# EAGLE board ArtNet SMD (EAGLE 5.11)
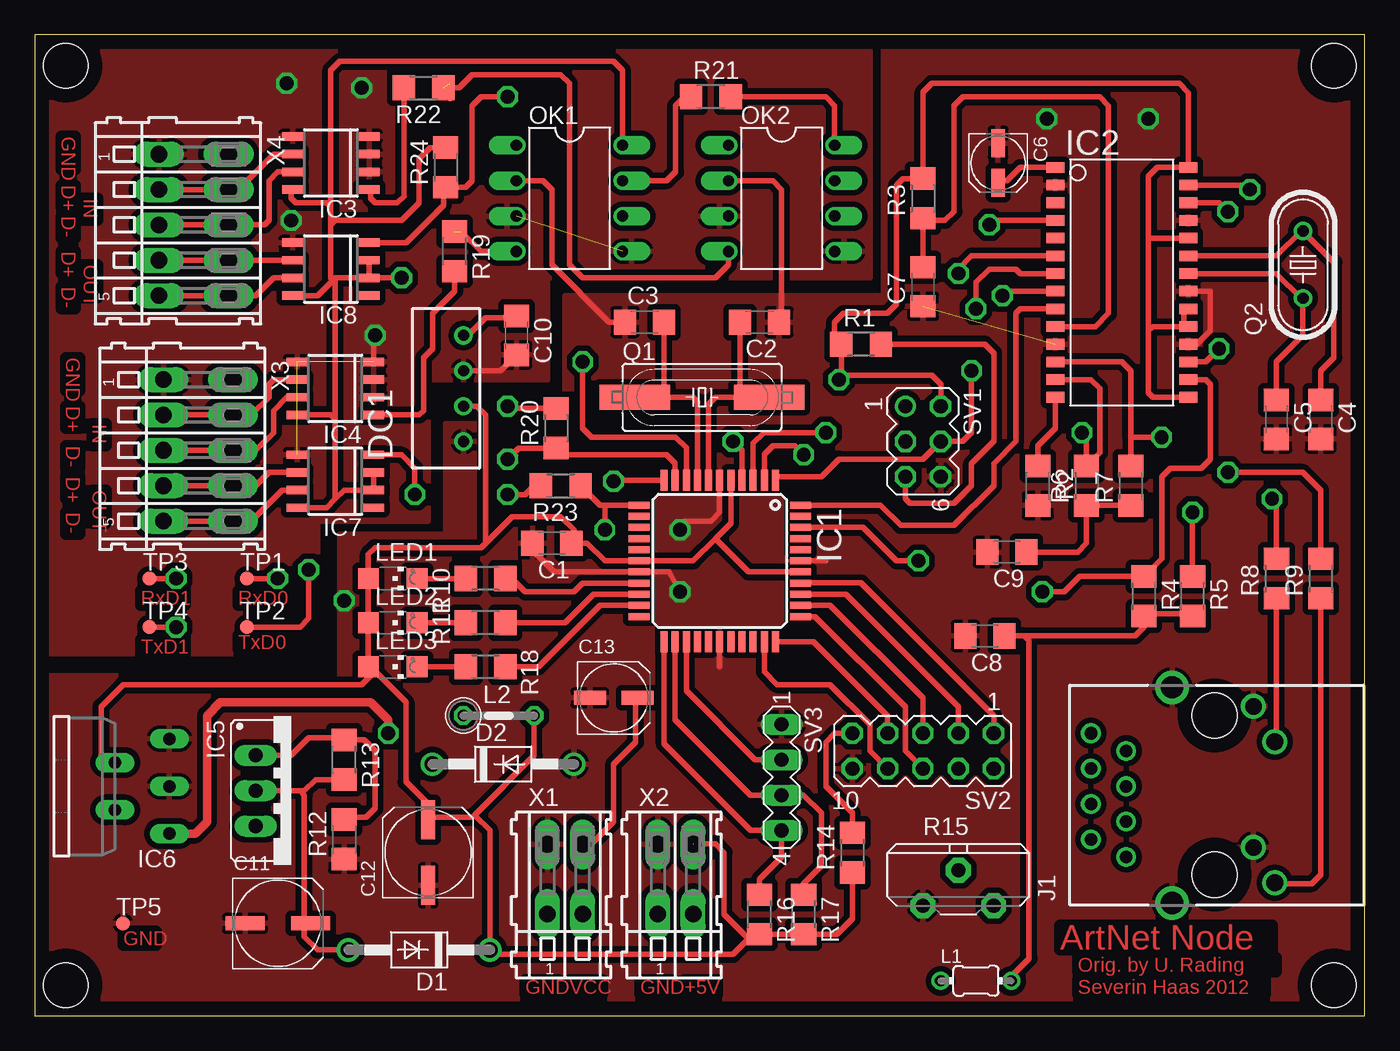
[diagram p0: board, top side]
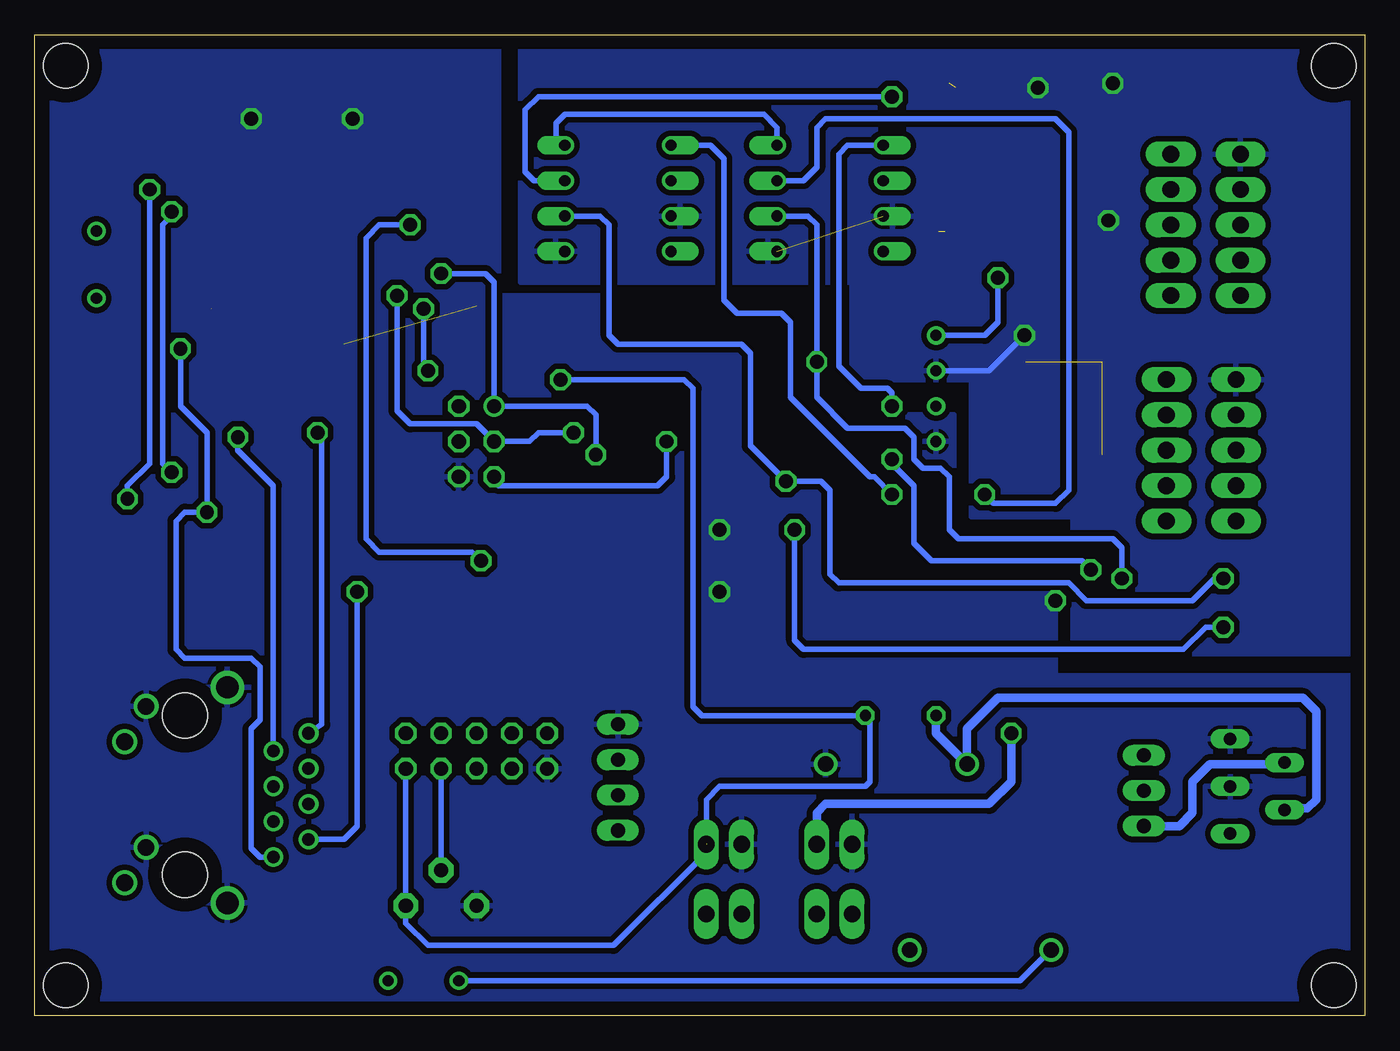
[diagram p1: board, bottom side, seen from below]

Size 95.56 x 70.47 mm. Coordinates in mm from the lower left corner, seen from the top.
Outline: 0,70.47 0,0 95.56,0 95.56,70.47 0,70.47
Copper layers (1*16): Top 0.035mm / dielectric 1.5mm / Bottom 0.035mm
Design rules "default": minimum track width 10mil, minimum drill 24mil, track to track 8mil, track to pad 8mil, pad to pad 8mil, via to via 8mil, smd to smd 8mil, copper to edge 40mil, drill to drill 8mil, minimum pad ring 10mil, minimum via ring 8mil, stop-mask expansion 4mil, vias tented up to drill 0mil, thermal gap 10mil
Holes 3.2 mm at 2.22,2.2 93.34,2.2 93.34,68.24 2.22,68.24

## Footprints (pad centres in the part's own frame; a part is rotated, then mirrored left to right if it is on the bottom)
C1206 = smd 1.6 x 1.8: 1 -1.4,0; 2 1.4,0
UD-4X5,8_NICHICON = smd 2 x 1: + 1.425,0; - -1.425,0
UD-6,3X7,7_NICHICON = smd 2.8 x 1: + 2.35,0; - -2.35,0
UD-5X5,8_NICHICON = smd 2.3 x 1: + 1.725,0; - -1.7,0
DO41-10 = drill 1.118 round: A 5.08,0; C -5.08,0
4SIL = drill 0.8 round: 1 -3.81,0; 2 -1.27,0; 3 1.27,0; 4 3.81,0
TQFP44 = smd 1.5 x 0.5: 1 -5.8,4; 2 -5.8,3.2; 3 -5.8,2.4; 4 -5.8,1.6; 5 -5.8,0.8; 6 -5.8,0; 7 -5.8,-0.8; 8 -5.8,-1.6; 9 -5.8,-2.4; 10 -5.8,-3.2; 11 -5.8,-4; 23 5.8,-4; 24 5.8,-3.2; 25 5.8,-2.4; 26 5.8,-1.6; 27 5.8,-0.8; 28 5.8,0; 29 5.8,0.8; 30 5.8,1.6; 31 5.8,2.4; 32 5.8,3.2; 33 5.8,4 | smd 0.5 x 1.5: 12 -4,-5.8; 13 -3.2,-5.8; 14 -2.4,-5.8; 15 -1.6,-5.8; 16 -0.8,-5.8; 17 0,-5.8; 18 0.8,-5.8; 19 1.6,-5.8; 20 2.4,-5.8; 21 3.2,-5.8; 22 4,-5.8; 34 4,5.8; 35 3.2,5.8; 36 2.4,5.8; 37 1.6,5.8; 38 0.8,5.8; 39 0,5.8; 40 -0.8,5.8; 41 -1.6,5.8; 42 -2.4,5.8; 43 -3.2,5.8; 44 -4,5.8
SO28W = smd 0.762 x 1.27: 1 -7.62,-4.78; 2 -6.35,-4.78; 3 -5.08,-4.78; 4 -3.81,-4.78; 5 -2.54,-4.78; 6 -1.27,-4.78; 7 0,-4.78; 8 1.27,-4.78; 9 2.54,-4.78; 10 3.81,-4.78; 11 5.08,-4.78; 12 6.35,-4.78; 13 7.62,-4.78; 14 8.89,-4.78; 15 8.89,4.78; 16 7.62,4.78; 17 6.35,4.78; 18 5.08,4.78; 19 3.81,4.78; 20 2.54,4.78; 21 1.27,4.78; 22 0,4.78; 23 -1.27,4.78; 24 -2.54,4.78; 25 -3.81,4.78; 26 -5.08,4.78; 27 -6.35,4.78; 28 -7.62,4.78
D_R-PDSO-G8 = smd 0.6 x 1.5: 1 -1.905,-2.75; 2 -0.635,-2.75; 3 0.635,-2.75; 4 1.905,-2.75; 5 1.905,2.75; 6 0.635,2.75; 7 -0.635,2.75; 8 -1.905,2.75
317TS = drill 1.016 long: 1 -2.54,-2.54; 2 0,-2.54; 3 2.54,-2.54
TO220-51 = drill 0.9 long: 1 -3.4,-8.4; 2 -1.7,-4.5; 3 0,-8.4; 4 1.7,-4.5; 5 3.4,-8.4
0569564 = drill 0.9 round: 1 -4.445,6.35; 2 -3.175,8.89; 3 -1.905,6.35; 4 -0.635,8.89; 5 0.635,6.35; 6 1.905,8.89; 7 3.175,6.35; 8 4.445,8.89 | drill 1.2 round: A1 -6.295,-4.32; A2 3.835,-4.32; C1 -3.755,-2.79; C2 6.375,-2.79 | drill 1.6 round: S1 -7.745,3.05; S2 7.745,3.05 | hole 3.25: -5.715,0; 5.715,0
LAL02 = drill 0.8 pad 1.3 round: 1 -2.54,0; 2 2.54,0
0207/5V = drill 0.813 octagon: 1 -2.54,0; 2 2.54,0
CHIPLED_1206 = smd 1.5 x 1.5: A 0,-1.75; C 0,1.75
DIL08 = drill 0.813 offset: 1 -3.81,-3.81; 2 -1.27,-3.81; 3 1.27,-3.81; 4 3.81,-3.81; 5 3.81,3.81; 6 1.27,3.81; 7 -1.27,3.81; 8 -3.81,3.81
SM49 = smd 5.08 x 1.778: 1 -4.826,0; 2 4.826,0
HC49U-V = drill 0.813 round: 1 -2.413,0; 2 2.413,0
R1206 = smd 1.6 x 1.803: 1 -1.422,0; 2 1.422,0
PT-10S = drill 1.016 pad 1.778 octagon: 1 -2.54,-1.27; 2 2.54,-1.27; 3 0,1.27
MA03-2 = drill 1.016 round: 1 -2.54,-1.27 | drill 1.016 octagon: 2 -2.54,1.27; 3 0,-1.27; 4 0,1.27; 5 2.54,-1.27; 6 2.54,1.27
MA05-2 = drill 1.016 octagon: 1 -5.08,-1.27; 2 -5.08,1.27; 3 -2.54,-1.27; 4 -2.54,1.27; 5 0,-1.27; 6 0,1.27; 7 2.54,-1.27; 8 2.54,1.27; 9 5.08,-1.27; 10 5.08,1.27
MA04-1 = drill 1.016 long: 1 -3.81,0; 2 -1.27,0; 3 1.27,0; 4 3.81,0
TP10R = smd 1 x 1: TP 0,0
233-502 = drill 1.2 long: A1 -1.27,2.5; A2 1.27,2.5; B1 -1.27,-2.5; B2 1.27,-2.5
233-505 = drill 1.2 long: A1 -5.08,2.5; A2 -2.54,2.5; A3 0,2.5; A4 2.54,2.5; A5 5.08,2.5; B1 -5.08,-2.5; B2 -2.54,-2.5; B3 0,-2.5; B4 2.54,-2.5; B5 5.08,-2.5

## Placement (x,y rotation side)
C1  [C1206]  37.15,33.95 180 top
C2  22p  [C1206]  52.07,49.83 180 top
C3  22p  [C1206]  43.81,49.83 0 top
C4  22p  [C1206]  92.39,42.84 270 top
C5  22p  [C1206]  89.22,42.84 270 top
C6  [UD-4X5,8_NICHICON]  69.22,61.26 270 top
C7  100n  [C1206]  63.82,52.37 90 top
C8  10n  [C1206]  68.26,27.29 180 top
C9  10n  [C1206]  69.85,33.32 180 top
C10  100n  [C1206]  34.61,48.88 270 top
C11  220u  [UD-6,3X7,7_NICHICON]  17.46,6.65 0 top
C12  330u  [UD-6,3X7,7_NICHICON]  28.26,11.73 90 top
C13  100u  [UD-5X5,8_NICHICON]  41.59,22.84 0 top
D1  1N4004  [DO41-10]  27.62,4.74 180 top
D2  BYV10  [DO41-10]  33.66,18.08 0 top
DC1  VA-0505S  [4SIL]  30.8,45.06 90 top
IC1  MEGA644P-AU  [TQFP44]  49.21,32.68 270 top
IC2  ENC28J60SO  [SO28W]  78.11,53.32 270 top
IC3  75176AD  [D_R-PDSO-G8]  21.27,61.26 90 top
IC4  75176AD  [D_R-PDSO-G8]  21.59,45.06 90 top
IC5  [317TS]  18.41,16.17 270 top
IC6  [TO220-51]  1.27,16.49 90 top
IC7  75176AD  [D_R-PDSO-G8]  21.59,38.4 90 top
IC8  75176AD  [D_R-PDSO-G8]  21.27,53.64 90 top
J1  0569564-2  [0569564]  84.77,15.86 90 top
L1  10u  [LAL02]  67.63,2.52 0 top
L2  L-MICC 330u  [0207/5V]  33.34,21.57 0 top
LED1  SMD LED 1206 GN  [CHIPLED_1206]  25.72,31.41 270 top
LED2  SMD LED 1206 GN  [CHIPLED_1206]  25.72,28.24 270 top
LED3  SMD LED 1206 GN  [CHIPLED_1206]  25.72,25.06 270 top
OK1  HCPL2630  [DIL08]  38.42,58.72 270 top
OK2  HCPL2630  [DIL08]  53.66,58.72 270 top
Q1  [SM49]  47.94,44.43 0 top
Q2  25MHz  [HC49U-V]  91.12,53.95 90 top
R1  10k  [R1206]  59.37,48.24 0 top
R2  2k7  [R1206]  72.07,38.08 270 top
R3  33k  [R1206]  63.82,58.72 90 top
R4  50  [R1206]  79.69,30.14 270 top
R5  50  [R1206]  83.19,30.14 270 top
R6  50  [R1206]  75.56,38.08 90 top
R7  50  [R1206]  78.74,38.08 90 top
R8  50  [R1206]  89.22,31.41 90 top
R9  50  [R1206]  92.39,31.41 90 top
R10  150  [R1206]  32.38,31.41 0 top
R11  150  [R1206]  32.38,28.24 0 top
R12  470  [R1206]  22.23,12.68 90 top
R13  270  [R1206]  22.23,18.39 270 top
R14  [R1206]  58.74,11.73 90 top
R15  PT-10S 10k  [PT-10S]  66.36,9.19 0 top
R16  10k  [R1206]  52.07,7.28 270 top
R17  10k  [R1206]  55.24,7.28 270 top
R18  150  [R1206]  32.38,25.06 0 top
R19  330  [R1206]  30.16,54.91 270 top
R20  330  [R1206]  37.47,42.21 90 top
R21  10k  [R1206]  48.58,66.02 0 top
R22  330  [R1206]  27.94,66.66 180 top
R23  330  [R1206]  37.78,38.08 180 top
R24  10k  [R1206]  29.53,60.94 90 top
SV1  [MA03-2]  63.82,41.25 270 top
SV2  [MA05-2]  63.82,19.03 180 top
SV3  [MA04-1]  53.66,17.12 270 top
TP1  TPTP10R  [TP10R]  15.24,31.41 0 top
TP2  TPTP10R  [TP10R]  15.24,27.92 0 top
TP3  TPTP10R  [TP10R]  8.26,31.41 0 top
TP4  TPTP10R  [TP10R]  8.26,27.92 0 top
TP5  TPTP10R  [TP10R]  6.35,6.65 0 top
X1  [233-502]  38.1,9.82 0 top
X2  [233-502]  46.04,9.82 0 top
X3  [233-505]  11.75,40.62 270 top
X4  [233-505]  11.43,56.81 270 top

## Library data of the parts
C1-C13 L1 L2 R1-R24 = rcl
D1 D2 = diode
DC1 = dc-dc-converter; OC_FARNELL: unknown; OC_NEWARK: unknown
IC1 = avr-7
IC2 = microchip-6
IC3 IC4 IC7 IC8 = 751xx
IC5 = v-reg
IC6 = linear
J1 = con-amp; OC_FARNELL: unknown; OC_NEWARK: unknown
LED1-LED3 = led
OK1 OK2 = optocoupler; MF: AGILENT TECHNOLOGIES; MPN: HCPL-2630-000E; OC_FARNELL: 9994904; OC_NEWARK: 88H7813
Q1 = crystal; OC_FARNELL: unknown; OC_NEWARK: unknown
Q2 = crystal; OC_FARNELL: 1666969; OC_NEWARK: unknown
SV1-SV3 = con-lstb; OC_FARNELL: unknown; OC_NEWARK: unknown
TP1-TP5 = testpad
X1 X2 = con-wago255; MPN: 233-502; OC_FARNELL: 1777096; OC_NEWARK: 58M2630
X3 X4 = con-wago; MF: Wago Corporation; MPN: 0233-0505; OC_FARNELL: unknown; OC_NEWARK: 79K2051

## Nets
+3V3: C11.+ D1.A IC5.2 L1.1 R13.2
+5V: C1.1 C12.+ D1.C DC1.2 IC1.5 IC1.17 IC1.38 IC2.15 IC2.19 IC2.20 IC2.24 IC2.28 IC5.3 IC6.4 L2.2 LED1.A LED2.A LED3.A R1.1 R3.2 R14.1 R15.2 R16.2 R17.2 SV1.2 SV2.2 X2.A2
AREF: IC1.29
AVCC: IC1.27
DISPL_CONTR: R15.3 SV2.4
DISPL_DB4: IC1.35 SV2.5
DISPL_DB5: IC1.34 SV2.6
DISPL_DB6: IC1.33 SV2.7
DISPL_DB7: IC1.32 SV2.8
DISPL_E: IC1.36 SV2.3
DISPL_RS: IC1.37 SV2.1
DMX1_IN_A: IC4.6 X3.B2
DMX1_IN_B: IC4.7 X3.B3
DMX1_OUT_A: IC7.6 X3.B4
DMX1_OUT_B: IC7.7 X3.B5
DMX2_IN_A: IC3.6 X4.B2
DMX2_IN_B: IC3.7 X4.B3
DMX2_OUT_A: IC8.6 X4.B4
DMX2_OUT_B: IC8.7 X4.B5
ETH: IC1.44 IC2.9
GND: C1.2 C2.1 C3.1 C4.2 C5.2 C6.- C7.1 C8.2 C9.2 C11.- C12.- C13.- D2.A DC1.1 IC1.6 IC1.18 IC1.28 IC1.39 IC2.2 IC2.11 IC2.18 IC2.21 IC2.25 IC6.3 IC6.5 J1.C1 J1.C2 J1.S1 J1.S2 OK1.2 OK2.2 R2.2 R12.1 R15.1 SV1.6 SV2.10 SV3.1 TP5.TP X1.A1 X2.A1
GNDI: C10.2 DC1.3 IC3.2 IC3.3 IC3.4 IC3.5 IC4.2 IC4.3 IC4.4 IC4.5 IC7.5 IC8.5 OK1.3 OK1.5 OK2.3 OK2.5 X3.B1 X4.B1
INT_ENC: IC1.42 IC2.4
LED1: IC1.19 R10.2
LED2: IC1.20 R11.2
LED3: IC1.21 R18.2
LEDA: IC2.27 R8.2
LEDB: IC2.26 R9.2
MISO: IC1.2 IC2.6 SV1.1
MOSI: IC1.1 IC2.7 SV1.4
N$1: C3.2 IC1.8 Q1.1
N$2: C2.2 IC1.7 Q1.2
N$3: C7.2 IC2.10 R3.1
N$4: C8.1 L1.2 R4.2 R5.2
N$5: R14.2 SV2.9
N$6: C9.1 R6.1 R7.1
N$7: J1.A2 R8.1
N$8: J1.A1 R9.1
N$9: LED1.C R10.1
N$10: C6.+ IC2.1
N$11: IC2.14 R2.1
N$12: LED3.C R18.1
N$13: C5.1 IC2.22 Q2.1
N$14: C4.1 IC2.23 Q2.2
N$15: LED2.C R11.1
N$17: IC5.1 R12.2 R13.1
N$19: C13.+ IC6.1 X1.A2
N$21: D2.C IC6.2 L2.1
N$23: OK1.4 R19.1
N$26: OK2.1 R23.2
N$27: OK2.4 R22.1
N$28: IC4.1 R19.2
N$29: IC3.1 R22.2
N$30: IC8.4 OK2.7 R24.1
N$32: IC7.4 OK1.7 R21.1
N$33: OK1.1 R20.2
RESET: IC1.4 R1.2 SV1.5
RXD0: IC1.9 OK1.6 TP1.TP
RXD1: IC1.11 OK2.6 TP3.TP
SCK: IC1.3 IC2.8 SV1.3
TAST1: IC1.23 R16.1 SV3.4
TAST2: IC1.24 R17.1 SV3.3
TAST3: IC1.25 SV3.2
TAST4: IC1.26
TPIN+: IC2.13 J1.8 R6.2
TPIN-: IC2.12 J1.7 R7.2
TPOUT+: IC2.17 J1.1 R5.1
TPOUT-: IC2.16 J1.2 R4.1
TXD0: IC1.10 R20.1 TP2.TP
TXD1: IC1.12 R23.1 TP4.TP
VCCIO: C10.1 DC1.4 IC3.8 IC4.8 IC7.2 IC7.3 IC7.8 IC8.2 IC8.3 IC8.8 OK1.8 OK2.8 R21.2 R24.2

## Tracks (layer width: path | path; a pad name or v marks a point on that pad's centre or on a via)
+3V3
  Top 0.406: D1.A 20.32,4.74 19.37,5.7 19.37,6.65 | C11.+ 19.37,6.65 | R13.2 20.17,16.97 19.37,16.17 19.05,16.17 | 19.05,16.17 IC5.2 | 19.37,6.65 19.37,15.86 19.05,16.17
  Bottom 0.406: L1.1 24.77,2.52 D1.A
+5V  (via drill 1)  (2 unrouted)
  Top 0.406: IC1.5 50.01,35.39 48.9,34.27 | 48.9,34.27 47.31,32.68 IC1.17 40.96,32.68 39.69,33.95 C1.1 38.73,34.14 38.73,34.9 37.78,35.86 34.29,35.86 32.38,33.95 | 80.01,55.86 80.01,60.3 80.64,60.94 IC2.28 82.89,66.32 82.23,66.97 64.45,66.97 63.82,66.34 R3.2 62.38,60.14 61.91,59.67 61.91,51.1 61.28,50.46 58.1,50.46 57.47,49.83 57.47,48.72 R1.1 57.95,45.87 v57.78,45.7 58.1,46.02 64.45,46.02 65.09,45.38 SV1.2 | 80.01,55.86 IC2.24 | 82.55,49.51 IC2.19 | 82.55,49.51 82.55,50.78 82.87,50.78 | 80.01,55.86 80.01,49.19 | 80.01,49.19 80.01,44.75 80.33,44.43 IC2.15 | 82.55,49.51 80.33,49.51 80.01,49.19 | L2.2 35.88,18.71 31.59,14.43 | 31.59,14.43 31.43,14.27 28.45,14.27 | 28.45,14.27 C12.+ 28.26,15.22 26.67,16.81 26.67,22.52 24.45,24.75 | 28.45,14.27 27.94,14.27 | 31.59,14.43 32.7,13.32 D1.C 33.02,4.43 50.16,4.43 51.6,5.86 R16.2 R17.2 57.63,5.86 58.74,6.97 R14.1 | 24.45,24.75 24.29,24.91 23.81,24.91 LED3.A LED2.A LED1.A 23.97,33.15 24.45,33.63 32.07,33.63 32.38,33.95 | 47.31,12.36 48.9,12.36 49.53,11.73 49.53,7.28 51.12,5.7 52.07,5.7 | 24.45,24.75 23.5,23.79 6.35,23.79 4.76,22.21 4.76,18.39 5.08,18.08 5.66,18.08 IC6.4 | IC1.38 51.28,31.88 48.9,34.27 | DC1.2 31.75,43.79 32.38,43.16 32.38,33.95
  Top 0.61: LED3.A 24.13,24.9
  Bottom 0.406: X2.A2 47.31,14.59 | SV2.2 R15.2 68.9,6.65 67.31,5.06 53.98,5.06 47.31,11.73 X2.A2 | X2.A2 47.31,15.54 46.35,16.49 35.88,16.49 35.56,16.81 35.56,21.25 L2.2 47.62,21.57 48.26,22.21 48.26,45.06 48.9,45.7 v57.78,45.7
  Bottom 0.61: IC5.3 13.34,13.63 12.38,14.59 12.38,16.81 11.11,18.08 5.88,18.08 IC6.4
DISPL_CONTR
  Bottom 0.406: R15.3 SV2.4
DISPL_DB4
  Top 0.406: IC1.35 55.04,29.51 57.15,29.51 63.82,22.84 SV2.5
DISPL_DB5
  Top 0.406: IC1.34 56.07,28.68 62.55,22.21 62.55,19.03 SV2.6
DISPL_DB6
  Top 0.406: SV2.7 61.28,21.57 55.97,26.88 IC1.33
DISPL_DB7
  Top 0.406: IC1.32 52.41,24.72 53.34,23.79 57.15,23.79 60.01,20.93 60.01,19.03 SV2.8
DISPL_E
  Top 0.406: IC1.36 58.28,30.28 66.36,22.21 SV2.3
DISPL_RS
  Top 0.406: IC1.37 55.02,31.09 59.37,31.09 68.9,21.57 SV2.1
DMX1_IN_A
  Top 0.406: X3.B2 15.56,43.16 16.83,44.43 16.83,45.38 17.14,45.7 IC4.6
DMX1_IN_B
  Top 0.406: X3.B3 15.88,40.62 17.14,41.89 17.14,43.48 18.1,44.43 IC4.7
DMX1_OUT_A
  Top 0.406: X3.B4 15.88,38.08 16.83,39.03 IC7.6
DMX1_OUT_B
  Top 0.406: X3.B5 15.56,35.54 17.78,37.76 IC7.7
DMX2_IN_A
  Top 0.406: X4.B2 14.61,59.35 | 14.61,59.35 15.24,59.35 | IC3.6 17.14,61.89 14.61,59.35
DMX2_IN_B
  Top 0.406: X4.B3 16.51,56.81 16.83,57.13 16.83,59.99 17.46,60.62 IC3.7
DMX2_OUT_A
  Top 0.406: X4.B4 IC8.6
DMX2_OUT_B
  Top 0.406: IC8.7 17.14,53 15.88,51.73 X4.B5
ETH
  Top 0.406: IC2.9 70.8,50.78 70.48,50.46 70.48,41.25 68.9,39.67 68.9,38.08 66.04,35.22 62.23,35.22 60.77,36.68 IC1.44
GND  (via drill 1)  (1 unrouted)
  Top 0.406: OK2.2 53.02,59.99 53.66,59.35 53.66,50.01 C2.1 | C1.2 35.75,33.45 37.31,31.88 IC1.18 45.57,31.88 v46.35,30.46 | OK1.2 36.51,59.99 37.15,59.35 37.15,53.95 41.27,49.83 C3.1 | 49.21,25.06 IC1.28 | IC1.39 56.83,32.68 | IC2.18 83.5,48.24 84.45,49.19 84.45,52.05 IC2.21 | IC1.6 49.21,36.17 48.58,35.54 46.67,35.54 v46.35,34.9
  other vias: 22.23,29.82 72.71,64.43 80.01,64.43
  pour Top (isolate 0.406): 94.93,69.83 94.93,0.61 0.64,0.61 0.64,24.43 21.91,24.43 21.91,34.59 29.53,34.59 29.53,42.52 38.1,42.52 38.1,51.73 60.96,51.73 60.96,69.83
  pour Bottom (isolate 0.406): 0.95,24.43 0.95,0.61 94.61,0.61 94.61,69.83 62.23,69.83 62.23,51.73 38.42,51.73 38.42,43.16 29.53,43.16 29.53,34.59 22.23,34.59 22.23,24.43
GNDI  (via drill 1)  (3 unrouted)
  Top 0.406: DC1.3 33.47,46.33 C10.2 | IC4.4 24.34,48.77 v24.45,48.88
  Bottom 0.406: DC1.3 26.99,46.33 v24.45,48.88
  other vias: 18.41,57.13 18.1,66.97 23.5,66.66
  pour Top (isolate 0.406): 0.64,69.83 60.01,69.83 60.01,53 36.83,53 36.83,45.7 28.26,45.7 28.26,35.54 20.32,35.54 20.32,26.02 0.64,26.02
  pour Bottom (isolate 0.406): 0.95,26.02 20.95,26.02 20.95,35.86 28.26,35.86 28.26,45.7 36.83,45.7 36.83,52.68 60.64,52.68 60.64,69.83 0.95,69.83
INT_ENC  (via drill 1)
  Top 0.406: IC2.4 68.9,57.13 v68.58,56.81 | IC1.42 59.51,35.08 61.91,32.68 v63.5,32.68
  Bottom 0.406: v68.58,56.81 70.8,56.81 71.75,55.86 71.75,34.27 70.8,33.32 64.14,33.32 v63.5,32.68
LED1
  Top 0.406: IC1.19 39.36,31.08 38.73,30.46 35.24,30.46 33.81,31.9 R10.2
LED2
  Top 0.406: IC1.20 40.15,30.28 38.1,28.24 R11.2
LED3
  Top 0.406: IC1.21 40.62,29.48 36.2,25.06 R18.2
LEDA  (via drill 1)
  Top 0.406: IC2.27 87,59.67 v87.31,59.35 | R8.2 89.22,36.81 v88.9,37.13
  Bottom 0.406: v87.31,59.35 87.31,39.67 88.9,38.08 v88.9,37.13
LEDB  (via drill 1)
  Top 0.406: IC2.26 85.09,58.4 v85.72,57.76 | v85.72,39.03 91.12,39.03 92.39,37.76 R9.2
  Bottom 0.406: v85.72,57.76 85.72,57.45 86.36,56.81 86.36,39.67 v85.72,39.03
MISO  (via drill 1)
  Top 0.406: IC2.6 67.31,54.59 66.36,53.64 v66.36,53.32 | IC1.2 52.41,40.33 53.02,40.94 54.61,40.94 v55.24,40.3
  Bottom 0.406: v66.36,53.32 63.18,53.32 62.55,52.68 SV1.1 55.88,43.79 55.24,43.16 v55.24,40.3
MOSI  (via drill 1)
  Top 0.406: IC1.1 53.21,38.71 56.52,38.71 57.78,39.98 63.82,39.98 SV1.4 66.67,41.25 67.31,41.89 v67.31,46.33 | IC2.7 70.8,53.32 70.48,53.64 68.58,53.64 67.63,52.68 v67.63,50.78
  Bottom 0.406: v67.63,50.78 67.63,46.65 v67.31,46.33
N$1
  Top 0.406: IC1.8 47.62,38.49 47.62,44.11 47.31,44.43 45.09,44.43 | Q1.1 45.09,44.43 | 45.09,44.43 45.4,44.75 45.22,44.93 C3.2
N$2
  Top 0.406: IC1.7 48.41,43.95 48.9,44.43 50.8,44.43 | 50.8,44.43 51.12,44.43 | 51.12,44.43 Q1.2 | 51.12,44.43 50.48,45.06 | C2.2 50.67,44.56 50.8,44.43
N$3
  Top 0.406: C7.2 R3.1 63.98,57.13 65.41,57.13 66.04,57.76 66.04,65.39 66.67,66.02 76.52,66.02 77.15,65.39 77.15,50.46 76.2,49.51 IC2.10
N$4
  Top 0.406: R5.2 83.03,28.87 79.54,28.87 R4.2 79.69,27.92 79.06,27.29 71.12,27.29 | 71.12,27.29 C8.1 | L1.2 70.17,2.84 71.44,4.11 71.44,26.97 71.12,27.29
N$5
  Top 0.406: R14.2 58.74,14.59 56.83,16.49 56.83,19.66 57.47,20.3 SV2.9
N$6
  Top 0.406: R7.1 R6.1 75.56,33.95 74.93,33.32 C9.1
N$7
  Top 0.406: R8.1 89.22,20.13 J1.A2
N$8
  Top 0.406: R9.1 92.39,10.14 91.76,9.51 89.15,9.51 J1.A1
N$9
  Top 0.406: LED1.C R10.1
N$10
  Top 0.406: IC2.1 70.8,60.94 69.85,59.99 69.37,59.99 C6.+
N$11
  Top 0.406: IC2.14 73.33,42.19 72.07,40.94 R2.1
N$12
  Top 0.406: LED3.C R18.1
N$13
  Top 0.406: IC2.22 89.22,53.32 91,51.54 Q2.1 91.12,48.88 89.22,46.97 C5.1
N$14
  Top 0.406: IC2.23 89.22,54.59 91,56.37 Q2.2 93.34,54.15 93.34,47.29 92.39,46.33 C4.1
N$15
  Top 0.406: LED2.C R11.1
N$16  (via drill 1)
  other vias: 67.63,50.78
N$17
  Top 0.406: 17.14,18.71 18.41,18.71 19.68,19.98 22.06,19.98 | R13.1 23.66,19.82 24.45,19.03 24.45,14.9 23.81,14.27 22.39,14.27
  Top 0.61: 17.14,18.71 IC5.1 | R13.1 22.06,19.98 | R12.2 22.39,14.27
N$19  (via drill 1)
  Top 0.406: X1.A2 39.97,12.32 41.59,13.95 41.59,18.08 43.18,19.66 43.18,22.7 C13.+
  Top 0.61: v25.4,20.3 25.4,21.25 24.13,22.52 13.34,22.52 12.38,21.57 12.38,13.95 11.52,13.09 IC6.1
  Bottom 0.61: v25.4,20.3 25.4,16.81 26.99,15.22 38.73,15.22 39.37,14.59 X1.A2
N$21
  Bottom 0.61: L2.1 30.8,20.3 D2.C 28.57,20.62 26.35,22.84 4.45,22.84 3.49,21.89 3.49,15.54 4.13,14.9 5.66,14.9 IC6.2
N$22  (via drill 1)
  other vias: 75.25,41.89
N$23  (1 unrouted)
  Top 0.406: 30.64,56.33 32.07,54.91 OK1.4
N$25  (via drill 1)
  other vias: 25.4,20.3
N$26  (via drill 1)
  Top 0.406: R23.2 35.88,38.08 35.24,37.45 v33.97,37.45
  Bottom 0.406: OK2.1 46.99,62.53 46.04,61.57 46.04,51.41 45.09,50.46 41.91,50.46 41.27,49.83 41.27,44.43 35.56,38.71 35.24,38.71 v33.97,37.45
N$27  (1 unrouted)
  Top 0.406: OK2.4 49.85,53.95 48.9,53 39.37,53 38.42,53.95 38.42,66.97 37.78,67.61 31.43,67.61 30.48,66.66 R22.1 | 29.84,65.87 29.84,66.97
N$28
  Top 0.406: IC4.1 27.62,43.16 27.94,43.48 27.94,47.29 28.57,47.92 28.57,50.46 30.16,52.05 R19.2
N$29
  Top 0.406: R22.2 26.52,58.88 26.04,58.4 24.45,58.4 24.13,58.72 24.13,59.24 IC3.1
N$30  (via drill 1)
  Top 0.406: IC8.4 26.67,55.54 29.36,58.23 29.36,59.35 R24.1 30.96,59.52 31.43,59.99 31.43,65.39 32.07,66.02 v33.97,66.02
  Bottom 0.406: OK2.7 59.69,59.99 60.33,60.62 60.33,65.07 59.37,66.02 v33.97,66.02
N$32  (via drill 1)
  Top 0.406: OK1.7 45.4,59.99 46.04,60.62 46.04,65.39 46.67,66.02 R21.1 | IC7.4 26.35,40.3 27.3,39.35 v27.3,37.45
  Bottom 0.406: OK1.7 40.32,59.99 39.37,60.94 39.37,63.8 38.73,64.43 22.23,64.43 21.27,63.48 21.27,37.76 22.23,36.81 26.67,36.81 v27.3,37.45
N$33  (via drill 1)
  Top 0.406: R20.2 34.14,43.63 v33.97,43.79
  Bottom 0.406: OK1.1 37.15,62.53 37.78,61.89 37.78,46.65 36.2,45.06 34.29,45.06 33.97,44.75 v33.97,43.79
N$35  (via drill 1)
  other vias: 19.68,32.05
N$37  (via drill 1)
  other vias: 50.16,41.25
RESET  (via drill 1)
  Top 0.406: SV1.5 62.55,37.13 62.87,36.81 66.04,36.81 67.31,38.08 67.31,39.67 68.9,41.25 68.9,47.6 68.26,48.24 R1.2 | v50.16,41.25 50.8,40.62 50.8,38.49 IC1.4
  Bottom 0.406: SV1.5 62.55,38.4 62.23,38.08 50.8,38.08 50.16,38.71 v50.16,41.25
RXD0  (via drill 1)
  Top 0.406: IC1.9 46.81,40.8 46.04,41.57 40.01,41.57 39.37,42.21 v39.37,46.97 | TP1.TP v17.46,31.41
  Bottom 0.406: 43.18,57.45 OK1.6 40.01,57.45 39.37,56.81 v39.37,46.97 39.37,44.43 37.15,42.21 33.02,42.21 32.38,41.57 32.38,39.98 31.75,39.35 30.48,39.35 29.84,38.71 29.84,34.9 29.21,34.27 18.1,34.27 17.46,33.63 v17.46,31.41
RXD1  (via drill 1)
  Top 0.406: IC1.11 41.68,38.48 v41.59,38.4 | TP3.TP v10.16,31.41
  Bottom 0.406: OK2.6 54.93,57.45 54.29,56.81 54.29,48.88 53.66,48.24 44.77,48.24 44.13,47.6 44.13,40.94 v41.59,38.4 39.05,38.4 38.42,37.76 38.42,31.73 37.78,31.09 21.27,31.09 20,29.82 12.38,29.82 10.79,31.41 v10.16,31.41
SCK  (via drill 1)
  Top 0.406: IC1.3 51.61,41.11 52.39,41.89 v56.83,41.89 | IC2.8 69.85,52.05 v69.53,51.73
  Bottom 0.406: v56.83,41.89 59.37,41.89 60.01,41.25 SV1.3 63.82,42.52 68.58,42.52 69.53,43.48 v69.53,51.73
TAST1
  Top 0.406: R16.1 52.07,9.82 53.66,11.41 SV3.4 51.44,13.32 45.21,19.54 IC1.23
TAST2
  Top 0.406: R17.1 55.24,9.51 56.52,10.78 56.52,14.59 55.24,15.86 SV3.3 51.44,15.86 46.01,21.28 IC1.24
TAST3
  Top 0.406: IC1.25 46.81,23.34 51.75,18.39 SV3.2
TPIN+  (via drill 1)
  Top 0.406: IC2.13 75.88,45.7 76.52,45.06 76.52,40.45 R6.2 75.56,41.57 v75.25,41.89
  Bottom 0.406: v75.25,41.89 74.93,41.89 74.93,20.93 J1.8
TPIN-  (via drill 1)
  Top 0.406: IC2.12 78.11,46.97 78.74,46.33 78.74,41.57 | 78.74,41.57 R7.2 | v80.96,41.57 78.74,41.57
  Bottom 0.406: J1.7 78.42,38.08 80.96,40.62 v80.96,41.57
TPOUT+  (via drill 1)
  Top 0.406: IC2.17 84.14,46.97 v85.09,47.92 | v83.19,36.17 R5.1
  Bottom 0.406: v85.09,47.92 85.09,43.79 83.19,41.89 v83.19,36.17 84.77,36.17 85.41,35.54 85.41,26.33 84.77,25.7 80.01,25.7 79.38,25.06 79.38,21.25 80.01,20.62 80.01,12.04 79.38,11.41 J1.1
TPOUT-  (via drill 1)
  Top 0.406: IC2.16 84.14,45.7 84.45,45.38 84.45,39.98 83.82,39.35 81.6,39.35 80.96,38.71 80.96,32.83 R4.1 75.08,31.56 73.98,30.46 v72.39,30.46
  Bottom 0.406: J1.2 73.34,12.68 72.39,13.63 v72.39,30.46
TXD0  (via drill 1)
  Top 0.406: IC1.10 46.01,39.69 45.4,40.3 37.62,40.3 R20.1 34.77,40.79 v33.97,39.98 | TP2.TP 19.05,27.92 19.68,28.55 v19.68,32.05
  Bottom 0.406: v33.97,39.98 33.97,39.67 32.38,38.08 32.38,33.95 31.11,32.68 20.32,32.68 v19.68,32.05
TXD1  (via drill 1)
  Top 0.406: 40.96,36.68 40.6,36.68 R23.1 | 40.96,36.68 IC1.12 | v40.96,34.9 40.96,36.68 | TP4.TP v10.16,27.92
  Bottom 0.406: v10.16,27.92 11.43,27.92 13.02,26.33 40.32,26.33 40.96,26.97 v40.96,34.9
VCCIO  (via drill 1)
  Top 0.406: IC7.3 IC7.2 22.23,37.76 21.59,37.13 | 21.59,37.13 20.95,36.49 IC7.8 | IC4.8 21.27,43.16 21.59,42.84 | 21.59,37.13 21.59,42.84 | IC8.8 20.32,51.73 21.43,52.84 | 21.59,53 21.43,52.84 | 21.59,53 IC8.2 | IC8.2 IC8.3 | 21.27,58.08 20.95,58.4 18.73,58.4 18.41,58.72 18.41,59.24 IC3.8 | 21.27,56.81 21.27,53 21.43,52.84 | 21.27,56.81 21.27,58.08 | IC8.2 v26.35,53 | 21.59,42.84 21.59,53 | OK2.8 57.47,65.39 56.83,66.02 R21.2 | DC1.4 31.11,48.88 32.38,50.14 34.48,50.14 C10.1 | 21.27,58.08 21.27,67.92 21.91,68.56 41.59,68.56 42.23,67.92 OK1.8 | R24.2 28.41,62.36 27.62,61.57 27.62,58.4 26.35,57.13 21.59,57.13 21.27,56.81
  Bottom 0.406: DC1.4 27.3,48.88 26.35,49.83 v26.35,53 | OK1.8 42.23,63.8 43.18,64.75 57.47,64.75 58.1,64.12 58.1,62.84 57.78,62.84 OK2.8

## Text on the board
Top: GND | D+ | IN | D- | D+ | OUT | D- | GND | D+ | IN | D- | D+ | Bohrungen vergrössern | OUT | ToDo: | D- | RxD1 | RxD0 | TxD1 | TxD0 | GND | ArtNet Node | Orig. by U. Rading | GND | VCC | GND | +5V | Severin Haas 2012